# Altium PCB PCB2.PcbDoc
Units mm, origin at the board's own origin, x right, y up, seen from the top; angles counter-clockwise.
Board outline 12.19 x 21.21 mm, 2 copper layers (Top Layer, Bottom Layer); 9 components, 7 nets, 31 pads, 12 vias.
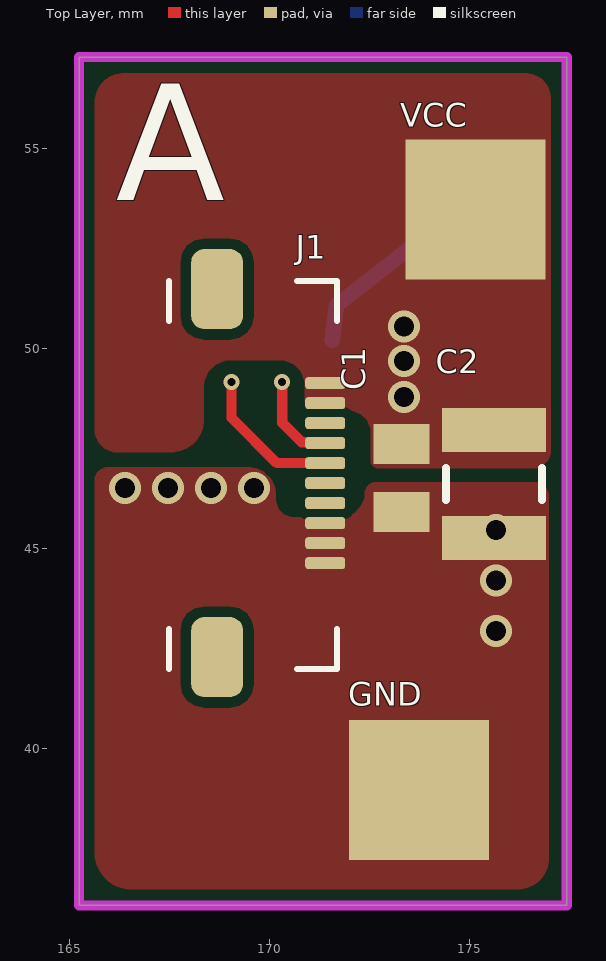
[diagram p0: Top Layer view]
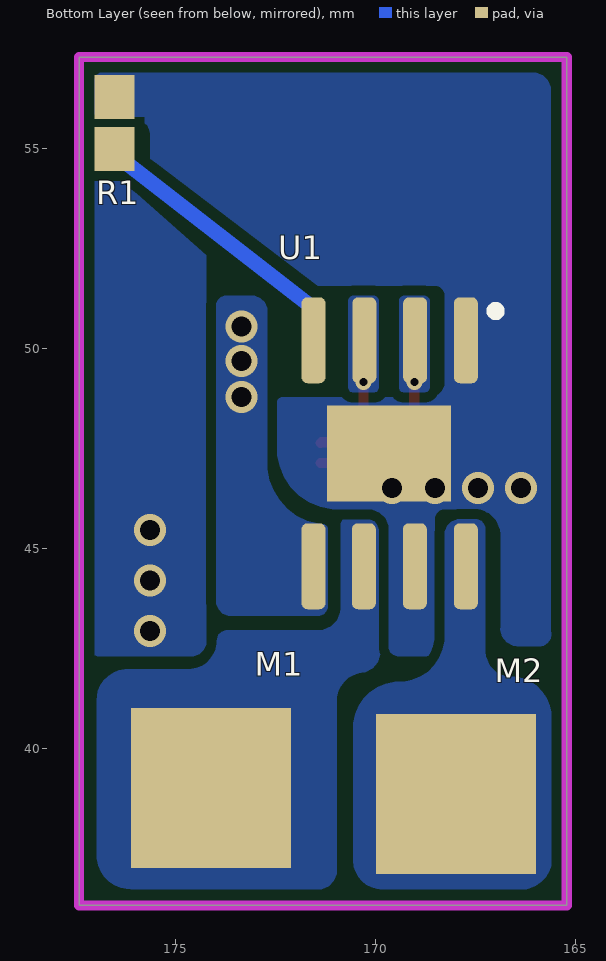
[diagram p1: Bottom Layer view, seen from below]

## Layer stack, top to bottom
Top Solder: solder mask 0.0102, Solder Resist, Dk 3.5
Top Layer: signal copper 0.0356
Dielectric 1: dielectric 0.32, FR-4, Dk 4.8
Bottom Layer: signal copper 0.0356
Bottom Solder: solder mask 0.0102, Solder Resist, Dk 3.5

## Board outline
165.227,36.068 177.419,36.068 177.419,57.277 165.227,57.277

## Design rules (kind name [scope] priority, off if disabled: settings)
Clearance [All] p1: gap=0.254 ignorepadtopadclearanceinfootprint=FALSE except(0: Arc-Arc Arc-Track Arc-SMDPad Arc-THPad Arc-Hole Track-Track Track-SMDPad Track-THPad Track-Hole SMDPad-SMDPad SMDPad-THPad SMDPad-Hole THPad-THPad THPad-Hole Via-Hole Fill-Hole Poly-Hole Region-Hole Text-Hole)
PolygonConnect [All] p1: connectstyle=Direct reliefconductorwidth=0.254 reliefentries=4 polygonreliefangle="90 Angle" airgapwidth=0.254
RoutingVias [All] p1: holewidth=0.711 width=1.27 viastyle="Through Hole" minholewidth=0.711 minwidth=1.27 maxholewidth=0.711 maxwidth=1.27
SolderMaskExpansion [All] p1: expansion=0.102 istentingtop=FALSE
Width [All] p1: maxlimit=0.508 minlimit=0.254 preferedwidth=0.254 toplayer_maxwidth=0.254 minimp=50.000000 maximp=50.000000 favimp=50.000000
30 further rules are at their usual default settings.

## Components (designator, comment, footprint, x,y, rotation, side; value= is the part's Value field where it differs from the comment)
C1 "0.1uF" C0805 173.275,46.75 r90 top
C2 "47uF" C1210 175.6,46.6 r90 top
GND "Ground Pad" PAD_ALIMENTAÇÃO_MINI 173.725,38.95 r0 top (schematic designator GND1)
J1 "505278-1033" FPC_CON 169.78,46.875 r270 top
M1 "Motor Pad" PAD_MOTOR_MINI 174.125,39 r180 bottom
M2 "Motor Pad" PAD_MOTOR_MINI 168,38.85 r180 bottom
R1 "30kOhms" RESC1608X55N 176.53,55.626 r90 bottom
U1 "DRV8871DDA" SO-PowerPad-8(8_pins) 169.672,47.371 r270 bottom
VCC "Source Pad" PAD_ALIMENTAÇÃO_MINI 175.133,53.467 r0 top (schematic designator VCC1)

## Footprints (in the part's own frame and the unit in brackets; to place one, negate y for a bottom-side part, rotate by r counter-clockwise, add the part's x,y. Pads: shape width x height; smd on the part's side, far side on the other; paste and mask are expansions set on the pad)
C0805 [mm]
  rect 1x1.4 smd: 1(-0.85,-0.008) 2(0.85,-0.008)
  body extent -1.07,-0.68 1.07,0.67, height 0.9
C1210 [mm] "Chip Capacitor, Body 3.2x2.5mm, IPC High Density"
  rect 1.1x2.6 smd: 1(-1.35,0) 2(1.35,0)
  silkscreen extent -0.4,-1.2 0.4,1.2, body extent -1.7,-1.35 1.7,1.35, height 1.3
FPC_CON [mm] "Small Outline IC (SOIC), 1.27 mm pitch; 8 pin, 4.90 mm L X 3.90 mm W X 1.75 mm H body"
  rrect50% 0.3x1 smd: 1(-2.25,1.6) 2(-1.75,1.6) 3(-1.25,1.6) 4(-0.75,1.6) 5(-0.25,1.6) 6(0.25,1.6) 7(0.75,1.6) 8(1.25,1.6) 9(1.75,1.6) 10(2.25,1.6)
  rrect50% 2x1.3 smd: MP1(-4.6,-1.1) MP2(4.6,-1.1)
  silkscreen extent -4.8,-2.3 4.9,1.9, body extent -5.25,-3.5 5.25,1.8, height 1.88
PAD_ALIMENTAÇÃO_MINI [mm]
  rect 3.5x3.5 smd: A(0,0)
PAD_MOTOR_MINI [mm]
  rect 4x4 smd: M(0,0)
RESC1608X55N [mm]
  rect 1.1x1 smd: 1(-0.65,0) 2(0.65,0)
  body extent -0.8,-0.4 0.8,0.4, height 0.55
SO-PowerPad-8(8_pins) [mm]
  rrect50% 2.15x0.6 smd: 1(-2.825,1.925) 2(-2.825,0.655) 3(-2.825,-0.615) 4(-2.825,-1.885) 5(2.825,-1.885) 6(2.825,-0.625) 7(2.825,0.65) 8(2.825,1.925)
  rect 2.4x3.1 smd: 9(0,0)
  silkscreen extent -3.66,2.57 -3.45,2.77, body extent -3,-2.45 3,2.45, height 1.7

## Part data
C1: library part C0805C104M3RACTU, "CAP CER 100nF 25V X7R 0805", Manufacturer=Kemet, Operating Temperature="-55 C ~ 125 C", Package / Case="0805(2012 mestric)", Supplier Part Number 1=80-C0805C104M3R, Tolerance=20%, Voltage - Rated="25 VDC", Category="Ceramic Capacitor", ComponentLink1Description=Datasheet, ComponentLink1URL=https://br.mouser.com/datasheet/2/212/KEM_C1002_X7R_SMD-1102033.pdf, ComponentLink2Description="Mouser Link", ComponentLink2URL=https://br.mouser.com/ProductDetail/KEMET/C0805C104M3RACTU?qs=jbCUrP3sAgSIdMuvv9W4Pg%3D%3D, Dieletric=X7R, ESR=-, Library Control - Checked Footprint=Yes, Library Control - Checked Schematic=Yes, Library Control - Last Update=25/08/22, Library Control - Person that Checked Footprint=Cage, Library Control - Person that Checked Schematic=Cage, Library Control - Person that did the Last Update Footprint=Cage, Library Control - Person that did the Last Update Schematic=Cage, Library Ref=Capacitor, Part Number=C0805C104M3RACTU, Price="1=0,13 10=0,064 100=0,037 1000=0,025 (USD)", Size / Dimension="1.25 mm W x 2 mm L x 0.78 mm H", Supplier 1=Mouser
C2: library part GRM32EC81C476KE15K, "CAP CER 47uF 16V X6S 1210", Manufacturer=Murata, Operating Temperature="-55°C ~ 105°C", Package / Case="1210 (3225 metric)", Supplier Part Number 1=81-GRM32EC81C476KE5K, Tolerance=10%, Voltage - Rated=16V, Category="Ceramic Capacitor", ComponentLink1Description=Datasheet, ComponentLink1URL=https://br.mouser.com/datasheet/2/281/1/GRM32EC81C476KE15_01A-1988154.pdf, ComponentLink2Description="Mouser Link", ComponentLink2URL=https://br.mouser.com/ProductDetail/Murata-Electronics/GRM32EC81C476KE15K?qs=pba5EUA0Y0ZfNhWUOosFbg%3D%3D, Dieletric=X6S, ESR=-, Library Control - Checked Footprint=Yes, Library Control - Checked Schematic=Yes, Library Control - Last Update=22/08/22, Library Control - Person that Checked Footprint=Cage, Library Control - Person that Checked Schematic=Cage, Library Control - Person that did the Last Update Footprint=Prisma, Library Control - Person that did the Last Update Schematic=Prisma, Library Ref=Capacitor, Part Number=GRM32EC81C476KE15K, Price="1=0,59 10=0,314 100=0,274 (USD)", Size / Dimension="3.2mm x 2.5mm x 2.5mm", Supplier 1=Mouser
GND: library part "Ground Pad Mini Sumô", "GND PAD MINI SUMÔ", Cable AWG="20 / 18 (AWG)", Library Ref=Pads, Recomended Category="Mini Sumô", Size="3.5 x 3.5 (mm)"
J1: library part 505278-1033_BODY, "CONN FFC/FPC HORZ 10POS 0.50MM", Current Rating (Amps)=500mA, Manufacturer=Molex, Operating Temperature="-40°C ~ 85°C", Supplier Part Number 1=538-505278-1033, Category=Connectors, ComponentLink1Description=Datasheet, ComponentLink1URL=https://br.mouser.com/datasheet/2/276/2/5052781033_FFC_FPC_CONNECTORS-772019.pdf, ComponentLink2Description="Mouser Link", ComponentLink2URL=https://br.mouser.com/ProductDetail/Molex/505278-1033?qs=c8NFF48pVsDStgrQCBOSTg%3D%3D, Contact Length - Mating=0.50mm, Contact Material=Tin, Contact Type=FFC/FPC, Insulation Material="Liquid Crystal Polymer", Library Control - Checked Footprint=Yes, Library Control - Checked Schematic=Yes, Library Control - Last Project that Used=Follow-Final, Library Control - Last Update="24/04/2021 00:25", Library Control - Person that Checked Footprint=Lucas, Library Control - Person that Checked Schematic=Lucas, Library Control - Person that did the Last Update Footprint=Mateus(Dimas), Library Control - Person that did the Last Update Schematic=Mateus(Dimas), Library Ref=Connectors, Mounting Type="Right Angle", Number of Positions=10, Number of Rows=1, Part Number=505278-1033, Pitch=0.50mm, Price="1=0,51000, 10=0,42900, 100=0,33400 (USD)", Supplier 1=Mouser, Termination=SMD
M1 M2: library part "Motor Pad Mini Sumô", "MOTOR PAD MINI SUMÔ", Cable AWG="20 / 18 (AWG)", Library Ref=Pads, Recomended Category="Mini Sumô", Size="3.5 x 3.5 (mm)"
R1: library part RC0603FR-0730KL, "RES SMD 30 kOHMS 1% 1/10W 0603", Manufacturer=YAGEO, Operating Temperature="- 55°C ~ 155°C", Package / Case="0603 (1608 Metric)", Power Rating="100 mW (1/10 W)", Resistor Type=Fixo, Supplier Part Number 1=603-RC0603FR-0730KL, Temperature Coefficient="100 PPM / C", Tolerance="1 %", Voltage Rating="50 V", Category="Thick Film Resistors - SMD", ComponentLink1Description="Mouser Link", ComponentLink1URL=https://br.mouser.com/ProductDetail/YAGEO/RC0603FR-0730KL?qs=diQw95jMAeNFr44yr782FQ%3D%3D, ComponentLink2Description=Datasheet, ComponentLink2URL=https://br.mouser.com/datasheet/2/447/Yageo_03_18_2021_PYu_RC_Group_51_RoHS_L_11-2199992.pdf, Library Control - Checked Footprint=Yes, Library Control - Checked Schematic=Yes, Library Control - Last Update="24/07/2021 11:34", Library Control - Person that Checked Footprint=Guilherme, Library Control - Person that Checked Schematic=Guilherme, Library Control - Person that did the Last Update Footprint=Guilherme, Library Control - Person that did the Last Update Schematic=Guilherme, Library Ref=Resistor, Part Number=RC0603FR-0730KL, Price="1=0,10, 10=0,024, 100=0,01(USD)", Size / Dimension="1,6 L x 0,8 W x 0,45 H", Supplier 1=Mouser
U1: "IC MTR DRV (6.5V ~ 45V) (3.5 A) SO-PowerPad-8", Current - Output=3.5A, Current - Peak Output (Source, Sink)="3.6A / 3.6A", Logic Voltage - VIL, VIH="VIL=0.5V / VIH=1.5V", Manufacturer="Texas Instruments", Operating Supply Current=3mA, Operating Temperature="-40°C ~ 125°C", Package / Case=SO-PowerPad-8, Power Dissipation="Irms^2 (HighSide Rds(On) + LowSide Rds(On))", Rds On - Drain-Source Resistance="565m ohm", Suplier Part Number 1=595-DRV8871DDA, Voltage - Load="(6.5V ~ 45V)", Category=Driver, ComponentLink1Description="Mouser Link / ST Link", ComponentLink1URL=https://br.mouser.com/ProductDetail/Texas-Instruments/DRV8871DDA?qs=Fobv33ltQGiluwfB07aSBw%3D%3D, ComponentLink2Description=Datasheet, ComponentLink2URL=https://www.ti.com/lit/ds/symlink/drv8871.pdf?HQS=dis-mous-null-mousermode-dsf-pf-null-wwe&ts=1623013148488&ref_url=https%253A%252F%252Fwww.google.com%252F, Library Control - Checked Footprint=Yes, Library Control - Checked Schematic=Yes, Library Control - Last Update="12/06/2021 17:04", Library Control - Person that Checked Footprint="Stéfany (Ster)", Library Control - Person that Checked Schematic="Stéfany (Ster)", Library Control - Person that did the Last Update Footprint="Maria Laura", Library Control - Person that did the Last Update Schematic="Stéfany (Ster)", Library Ref=Driver, Logic (IN-SD/High Low)=IN-SD, Output Configuration="Half Bridge (2)", Part Number=DRV8871DDA, Price="1=3,15000, 10=2,84000, 100=2,31000 (USD)", Supplier 1=Mouser, Technology="Power MOSFET", Voltage - Supply="(6.5V ~ 45V)"
VCC: library part "Source Pad Mini Sumô", "VCC PAD MINI SUMÔ", Cable AWG="20 / 18 (AWG)", Library Ref=Pads, Recomended Category="Mini Sumô", Size="3.5 x 3.5 (mm)"

## Via types
v1: diameter 0.8, hole 0.5, Top Layer to Bottom Layer, tented both sides, 10 vias
v2: diameter 0.4, hole 0.2, Top Layer to Bottom Layer, tented both sides, 2 vias

## Nets (pads, with @x,y where several pads share a name; then routed paths per layer and width w, separated by ;. In a path a pad name is that pad's centre, name@x,y a point inside that pad or via, vN(x,y) a via of type N, cw(c..) or ccw(c..) an arc to the next point about the centre after c; other vN are vias at no path point)
GND: C1.1 C2.1 GND.A J1.8 J1.9 J1.10 R1.2 U1.1 U1.7 U1.9 | length 0.1
  Bottom Layer w0.254: U1.9@168.42,46.5 U1.9@168.475,46.5
  other v1: 175.65,42.926 175.65,44.188 175.65,45.45 166.375,46.5 167.45,46.5 168.525,46.5 169.6,46.5
ILIM: R1.1 U1.4 | length 7.1
  Bottom Layer w0.381: U1.4 171.666,51.081 176.22,54.616 R1.1
IN1: J1.4 U1.3 | length 2.3
  Top Layer w0.254: v2(170.307,49.149) 170.307,48.133 170.792,47.648 171.357,47.648 J1.4
IN2: J1.5 U1.2 | length 3.7
  Top Layer w0.254: v2(169.037,49.149) 169.037,48.26 170.172,47.125 J1.5
OUT1: M1.M U1.6
OUT2: M2.M U1.8
VM: C1.2 C2.2 J1.1 J1.2 U1.5 VCC.A
  other v1: 173.355,48.775 173.355,49.675 173.355,50.546
pads on no net: J1.3 J1.6 J1.7 J1.MP1 J1.MP2

## Polygon pours and split planes (outlines as drawn)
GND on Bottom Layer "GND_L02_P022" (solid, pour order 22): 176.025,55.725 ccw(c176.025,55.341) 175.641,55.341 175.641,55.225 175.6,55.225 cw(c175.6,55.675) 175.15,55.675 cw(c175.425,55.675) 175.425,55.95 176.375,55.95
OUT1 on Bottom Layer "OUT1_L02_P021" (solid, pour order 21): 169.9,44.85 169.9,45.6 cw(c170.025,45.6) 170.025,45.725 170.75,45.725 cw(c170.75,45.6) 170.875,45.6 170.875,43.5 ccw(c171.425,43.5) 171.425,42.95 173.7,42.95 cw(c173.7,42.675) 173.975,42.675 ccw(c174.675,42.675) 174.675,41.975 176.2,41.975 cw(c176.2,41.2) 176.975,41.2 176.975,37.325 cw(c176.125,37.325) 176.125,36.475 171.45,36.475 cw(c171.45,36.95) 170.975,36.95 170.975,41.075 ccw(c170.263,41.175) 170.362,41.888 cw(c170.412,42.4) 169.9,42.45 169.9,42.675
GND on Bottom Layer "GND_L02_P013" (solid, pour order 13): 174.244,42.672 ccw(c174.625,42.672) 174.625,42.291 176.911,42.291 ccw(c176.911,42.545) 177.165,42.545 177.165,54.102 ccw(c177.038,54.102) 177.038,54.229 176.403,54.229 174.244,52.324
GND on Bottom Layer "GND_L02_P010" (solid, pour order 10): 168.783,42.291 169.418,42.291 ccw(c169.418,42.545) 169.672,42.545 169.672,45.466 cw(c170.18,45.466) 170.18,45.974 170.942,45.974 ccw(c170.942,47.498) 172.466,47.498 172.466,48.641 ccw(c172.339,48.641) 172.339,48.768 168.656,48.768 cw(c168.656,49.149) 168.275,49.149 168.275,51.308 cw(c168.529,51.308) 168.529,51.562 171.45,51.562 175.641,54.737 175.641,55.712 176.838,55.712 ccw(c176.838,55.9) 177.025,55.9 177.025,56.725 ccw(c176.819,56.69) 176.784,56.896 166.096,56.896 ccw(c166.096,56.425) 165.625,56.425 165.625,42.925 ccw(c165.933,42.853) 165.862,42.545 166.475,42.545 ccw(c166.423,43) 166.878,43.053 166.878,45.339 cw(c167.513,45.339) 167.513,45.974 168.275,45.974 cw(c168.275,45.72) 168.529,45.72 168.529,42.545 ccw(c168.783,42.545)
VM on Bottom Layer "VM_L02_P006" (solid, pour order 6): 171.318,45.598 ccw(c171.196,47.117) 172.72,47.117 172.72,50.927 cw(c173.101,50.927) 173.101,51.308 173.736,51.308 cw(c173.736,51.054) 173.99,51.054 173.99,43.688 cw(c173.609,43.688) 173.609,43.307 171.45,43.307 cw(c171.45,43.561) 171.196,43.561 171.196,45.466 cw(c171.328,45.466)
OUT2 on Bottom Layer "OUT2_L02_P002" (solid, pour order 2): 167.894,45.72 cw(c167.894,45.339) 168.275,45.339 168.275,42.799 ccw(c169.418,42.799) 169.418,41.656 cw(c169.418,40.513) 170.561,40.513 170.561,37.25 cw(c169.843,37.193) 169.9,36.475 166.225,36.475 cw(c166.416,37.283) 165.608,37.475 165.608,40.767 cw(c166.624,40.767) 166.624,41.783 ccw(c166.624,42.418) 167.259,42.418 167.259,45.466 cw(c167.513,45.466) 167.513,45.72
IN1 on Bottom Layer "IN1_L02_P001" (solid, pour order 1): 170.561,51.308 cw(c170.561,51.181) 170.688,51.181 170.688,49.022 cw(c170.561,49.022) 170.561,48.895 170.053,48.895 cw(c170.053,49.022) 169.926,49.022 169.926,51.181 cw(c170.053,51.181) 170.053,51.308
IN2 on Bottom Layer "IN2_L02_P000" (solid, pour order 0): 168.783,51.308 169.291,51.308 cw(c169.291,51.181) 169.418,51.181 169.418,49.022 cw(c169.291,49.022) 169.291,48.895 168.783,48.895 cw(c168.783,49.022) 168.656,49.022 168.656,51.181 cw(c168.783,51.181)
VM on Top Layer "VM_L01_P023" (solid, pour order 23): 170.25,49.7 cw(c170.25,49.075) 170.875,49.075 170.875,48.6 ccw(c171.025,48.6) 171.025,48.45 171.95,48.45 cw(c171.95,47.875) 172.525,47.875 172.525,47.175 ccw(c172.7,47.175) 172.7,47 176.575,47 ccw(c176.575,47.45) 177.025,47.45 177.025,56.225 ccw(c176.375,56.225) 176.375,56.875 166.35,56.875 ccw(c166.35,56.15) 165.625,56.15 165.625,47.975 ccw(c166.2,47.975) 166.2,47.4 167.525,47.4 ccw(c167.525,48.225) 168.35,48.225 168.35,49.05 cw(c169,49.05) 169,49.7
GND on Top Layer "GND_L01_P020" (solid, pour order 20): 170.6,45.775 cw(c170.6,46.225) 170.15,46.225 170.15,46.325 ccw(c169.45,46.325) 169.45,47.025 165.95,47.025 ccw(c165.95,46.7) 165.625,46.7 165.625,37.375 ccw(c166.525,37.375) 166.525,36.475 176.2,36.475 ccw(c176.2,37.25) 176.975,37.25 176.975,46.275 ccw(c176.6,46.275) 176.6,46.65 172.65,46.65 ccw(c172.65,46.375) 172.375,46.375 cw(c171.775,46.375) 171.775,45.775 171.75,45.775
VM on Top Layer "VM_L01_P017" (solid, pour order 17): 172.595,48.387 cw(c172.595,48.262) 172.72,48.262 172.72,48.26 cw(c172.974,48.26) 172.974,48.514

## Keep-outs
Keep-Out Layer:
  the board outline again, w0.254

## Silkscreen, mask and mechanical layers (free items; w line width, h text height)
Top Overlay:
  text "A" at 166.15,52.73 h5
BoardOutLine:
  the board outline again, w0.254